# Altium PCB WorldClock.PcbDoc (part 2 of 13)
Units mil, origin at the board's own origin, x right, y up, seen from the top; angles counter-clockwise.
Board outline 3700 x 3850 mil, 2 copper layers (Top Layer, Bottom Layer); 227 components, 134 nets, 1324 pads, 248 vias.
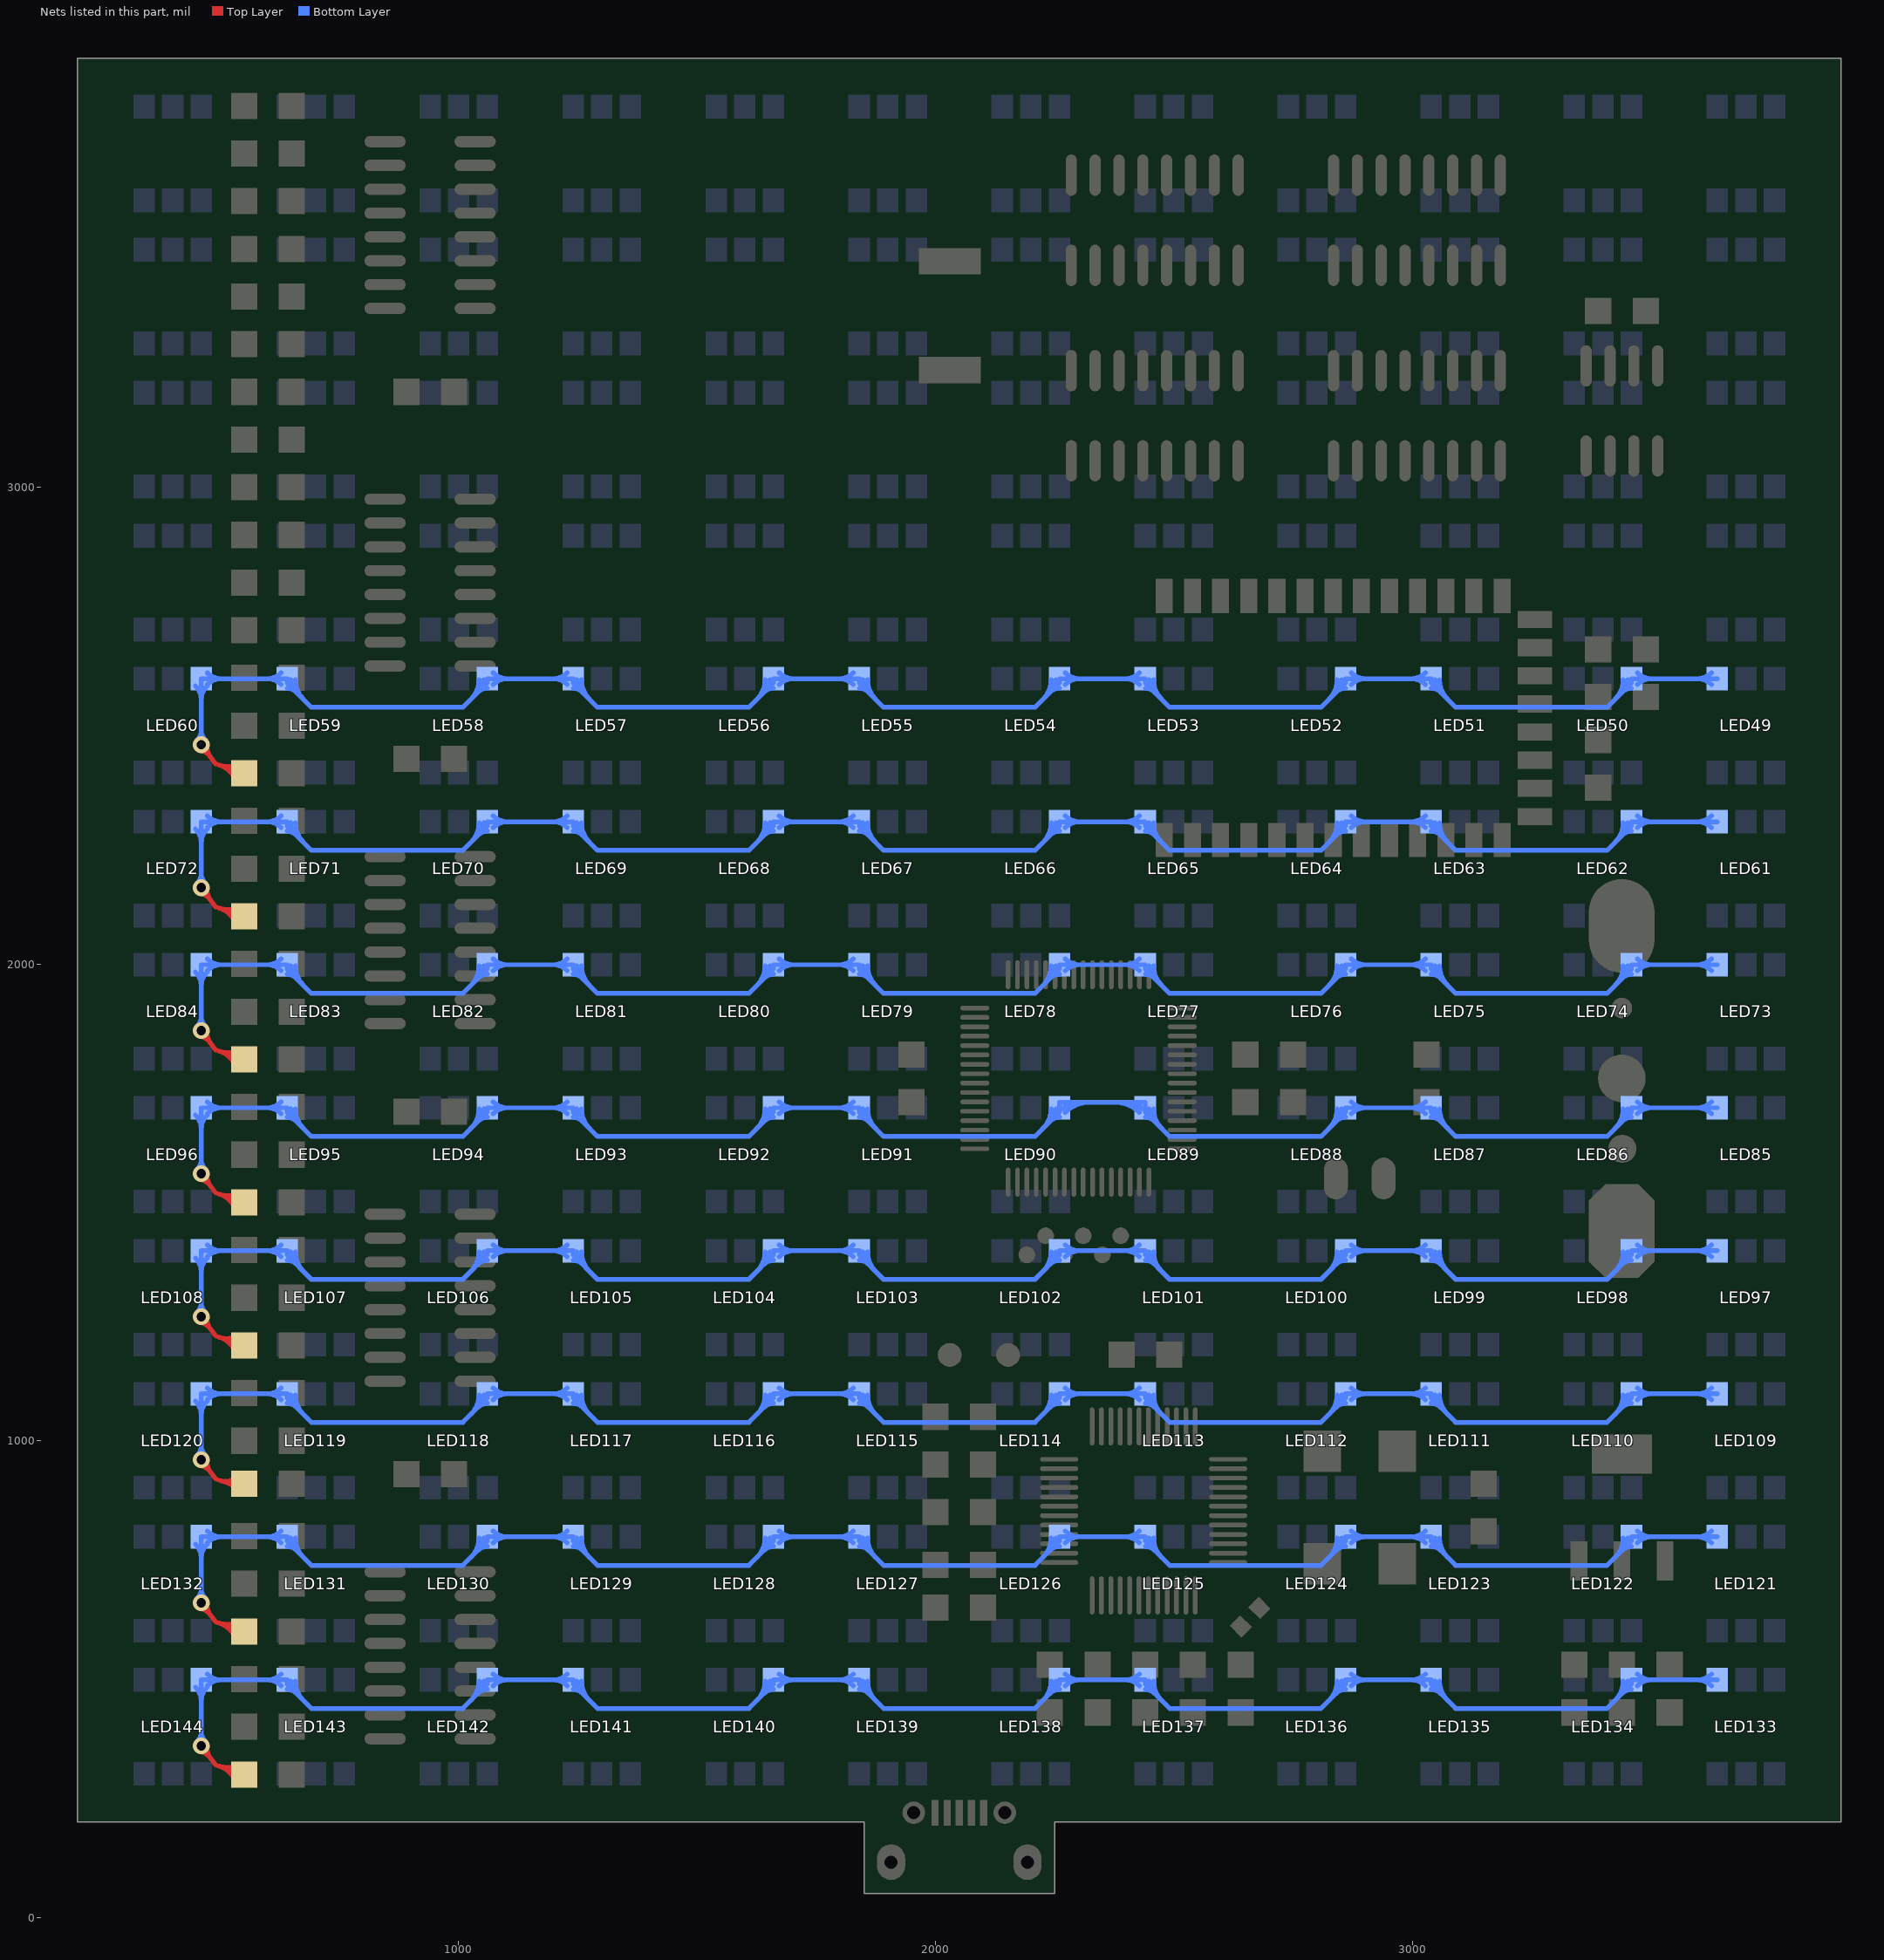
[diagram p2: the nets of this part, all layers, seen from the top]

## Via types
v1: diameter 35, hole 20, Top Layer to Bottom Layer, tented both sides, 213 vias
v2: diameter 24, hole 12, Top Layer to Bottom Layer, tented both sides, 35 vias

## Nets (pads, with @x,y where several pads share a name; then routed paths per layer and width w, separated by ;. In a path a pad name is that pad's centre, name@x,y a point inside that pad or via, vN(x,y) a via of type N, cw(c..) or ccw(c..) an arc to the next point about the centre after c; other vN are vias at no path point) (continued)
B5: LED49.1 LED50.3 LED51.1 LED52.3 LED53.1 LED54.3 LED55.1 LED56.3 LED57.1 LED58.3 LED59.1 LED60.3 R24.1 | length 5745.2
  Top Layer w10: v1@458.23,2447.63 cw(c453.96,2417.75) 478.11,2435.86 cw(c502.25,2453.96) v1@472.37,2458.23 ; v1(460,2460) 490,2420 R24.1@550,2400 ; R24.1@529.88,2389.94 ccw(c481.29,2365.65) 498.47,2417.18 ccw(c515.65,2468.71) R24.1@539.94,2420.12 ; R24.1@538.82,2394.41 ccw(c511.83,2380.91) 521.37,2409.54 ccw(c530.91,2438.17) R24.1@544.41,2411.18
  Bottom Layer w10: LED60.3@447.63,2583.55 cw(c417.75,2553.68) 460,2553.68 cw(c502.25,2553.68) LED60.3@472.37,2583.55 ; v1@451.16,2468.84 ccw(c429.82,2490.18) 460,2490.18 ccw(c490.18,2490.18) v1@468.84,2468.84 ; v1(460,2460) LED60.3@460,2598.43 LED59.1@640,2598.43 640,2589.71 691.29,2538.43 1008.71,2538.43 1060,2589.71 LED58.3@1060,2598.43 LED57.1@1240,2598.43 1240,2589.71 1291.29,2538.43 1608.71,2538.43 1660,2589.71 LED56.3@1660,2598.43 LED55.1@1840,2598.43 1840,2589.71 1891.29,2538.43 2208.71,2538.43 2260,2589.71 LED54.3@2260,2598.43 LED53.1@2440,2598.43 2440,2589.71 2491.29,2538.43 2808.71,2538.43 2860,2589.71 LED52.3@2860,2598.43 LED51.1@3040,2598.43 3040,2589.71 3091.29,2538.43 3408.71,2538.43 3460,2589.71 LED50.3@3460,2598.43 LED49.1@3640,2598.43 ; LED60.3@472.37,2586.05 cw(c502.25,2556.18) 502.25,2598.43 cw(c502.25,2640.67) LED60.3@472.37,2610.8 ; LED59.1@627.63,2586.05 ccw(c597.75,2556.18) 597.75,2598.43 ccw(c597.75,2640.67) LED59.1@627.63,2610.8 ; LED59.1@640,2578.43 cw(c640,2551.18) 659.27,2570.44 ; LED59.1@647.5,2595.93 ccw(c680.61,2595.93) 657.2,2572.52 ; LED59.1@657.5,2595.93 ccw(c714.75,2595.93) 674.27,2555.44 ; 1025.73,2555.44 ccw(c985.25,2595.93) LED58.3@1042.5,2595.93 ; 1040.73,2570.44 cw(c1060,2551.18) LED58.3@1060,2578.43 ; 1042.8,2572.52 ccw(c1019.39,2595.93) LED58.3@1052.5,2595.93 ; LED58.3@1072.37,2586.05 cw(c1102.25,2556.18) 1102.25,2598.43 cw(c1102.25,2640.67) LED58.3@1072.37,2610.8 ; LED57.1@1227.63,2586.05 ccw(c1197.75,2556.18) 1197.75,2598.43 ccw(c1197.75,2640.67) LED57.1@1227.63,2610.8 ; LED57.1@1240,2578.43 cw(c1240,2551.18) 1259.27,2570.44 ; LED57.1@1247.5,2595.93 ccw(c1280.61,2595.93) 1257.2,2572.52 ; LED57.1@1257.5,2595.93 ccw(c1314.75,2595.93) 1274.27,2555.44 ; 1625.73,2555.44 ccw(c1585.25,2595.93) LED56.3@1642.5,2595.93 ; 1640.73,2570.44 cw(c1660,2551.18) LED56.3@1660,2578.43 ; 1642.8,2572.52 ccw(c1619.39,2595.93) LED56.3@1652.5,2595.93 ; LED56.3@1672.37,2586.05 cw(c1702.25,2556.18) 1702.25,2598.43 cw(c1702.25,2640.67) LED56.3@1672.37,2610.8 ; LED55.1@1827.63,2586.05 ccw(c1797.75,2556.18) 1797.75,2598.43 ccw(c1797.75,2640.67) LED55.1@1827.63,2610.8 ; LED55.1@1840,2578.43 cw(c1840,2551.18) 1859.27,2570.44 ; LED55.1@1847.5,2595.93 ccw(c1880.61,2595.93) 1857.2,2572.52 ; LED55.1@1857.5,2595.93 ccw(c1914.75,2595.93) 1874.27,2555.44 ; 2225.73,2555.44 ccw(c2185.25,2595.93) LED54.3@2242.5,2595.93 ; 2240.73,2570.44 cw(c2260,2551.18) LED54.3@2260,2578.43 ; 2242.8,2572.52 ccw(c2219.39,2595.93) LED54.3@2252.5,2595.93 ; LED54.3@2272.37,2586.05 cw(c2302.25,2556.18) 2302.25,2598.43 cw(c2302.25,2640.67) LED54.3@2272.37,2610.8 ; LED53.1@2427.63,2586.05 ccw(c2397.75,2556.18) 2397.75,2598.43 ccw(c2397.75,2640.67) LED53.1@2427.63,2610.8 ; LED53.1@2440,2578.43 cw(c2440,2551.18) 2459.27,2570.44 ; LED53.1@2447.5,2595.93 ccw(c2480.61,2595.93) 2457.2,2572.52 ; LED53.1@2457.5,2595.93 ccw(c2514.75,2595.93) 2474.27,2555.44 ; 2825.73,2555.44 ccw(c2785.25,2595.93) LED52.3@2842.5,2595.93 ; 2840.73,2570.44 cw(c2860,2551.18) LED52.3@2860,2578.43 ; 2842.8,2572.52 ccw(c2819.39,2595.93) LED52.3@2852.5,2595.93 ; LED52.3@2872.37,2586.05 cw(c2902.25,2556.18) 2902.25,2598.43 cw(c2902.25,2640.67) LED52.3@2872.37,2610.8 ; LED51.1@3027.63,2586.05 ccw(c2997.75,2556.18) 2997.75,2598.43 ccw(c2997.75,2640.67) LED51.1@3027.63,2610.8 ; LED51.1@3040,2578.43 cw(c3040,2551.18) 3059.27,2570.44 ; LED51.1@3047.5,2595.93 ccw(c3080.61,2595.93) 3057.2,2572.52 ; LED51.1@3057.5,2595.93 ccw(c3114.75,2595.93) 3074.27,2555.44 ; 3425.73,2555.44 ccw(c3385.25,2595.93) LED50.3@3442.5,2595.93 ; 3440.73,2570.44 cw(c3460,2551.18) LED50.3@3460,2578.43 ; 3442.8,2572.52 ccw(c3419.39,2595.93) LED50.3@3452.5,2595.93 ; LED50.3@3472.37,2586.05 cw(c3502.25,2556.18) 3502.25,2598.43 cw(c3502.25,2640.67) LED50.3@3472.37,2610.8 ; LED49.1@3627.63,2586.05 ccw(c3597.75,2556.18) 3597.75,2598.43 ccw(c3597.75,2640.67) LED49.1@3627.63,2610.8
B6: LED61.1 LED62.3 LED63.1 LED64.3 LED65.1 LED66.3 LED67.1 LED68.3 LED69.1 LED70.3 LED71.1 LED72.3 R26.1 | length 5745.2
  Top Layer w10: v1@458.23,2147.63 cw(c453.96,2117.75) 478.11,2135.86 cw(c502.25,2153.96) v1@472.37,2158.23 ; v1(460,2160) 490,2120 R26.1@550,2100 ; R26.1@529.88,2089.94 ccw(c481.29,2065.65) 498.47,2117.18 ccw(c515.65,2168.71) R26.1@539.94,2120.12 ; R26.1@538.82,2094.41 ccw(c511.83,2080.91) 521.37,2109.54 ccw(c530.91,2138.17) R26.1@544.41,2111.18
  Bottom Layer w10: LED72.3@447.63,2283.55 cw(c417.75,2253.68) 460,2253.68 cw(c502.25,2253.68) LED72.3@472.37,2283.55 ; v1@451.16,2168.84 ccw(c429.82,2190.18) 460,2190.18 ccw(c490.18,2190.18) v1@468.84,2168.84 ; v1(460,2160) LED72.3@460,2298.43 LED71.1@640,2298.43 640,2289.71 691.29,2238.43 1008.71,2238.43 1060,2289.71 LED70.3@1060,2298.43 LED69.1@1240,2298.43 1240,2289.71 1291.29,2238.43 1608.71,2238.43 1660,2289.71 LED68.3@1660,2298.43 LED67.1@1840,2298.43 1840,2289.71 1891.29,2238.43 2208.71,2238.43 2260,2289.71 LED66.3@2260,2298.43 LED65.1@2440,2298.43 2440,2289.71 2491.29,2238.43 2808.71,2238.43 2860,2289.71 LED64.3@2860,2298.43 LED63.1@3040,2298.43 3040,2289.71 3091.29,2238.43 3408.71,2238.43 3460,2289.71 LED62.3@3460,2298.43 LED61.1@3640,2298.43 ; LED72.3@472.37,2286.05 cw(c502.25,2256.18) 502.25,2298.43 cw(c502.25,2340.67) LED72.3@472.37,2310.8 ; LED71.1@627.63,2286.05 ccw(c597.75,2256.18) 597.75,2298.43 ccw(c597.75,2340.67) LED71.1@627.63,2310.8 ; LED71.1@640,2278.43 cw(c640,2251.18) 659.27,2270.44 ; LED71.1@647.5,2295.93 ccw(c680.61,2295.93) 657.2,2272.52 ; LED71.1@657.5,2295.93 ccw(c714.75,2295.93) 674.27,2255.44 ; 1025.73,2255.44 ccw(c985.25,2295.93) LED70.3@1042.5,2295.93 ; 1040.73,2270.44 cw(c1060,2251.18) LED70.3@1060,2278.43 ; 1042.8,2272.52 ccw(c1019.39,2295.93) LED70.3@1052.5,2295.93 ; LED70.3@1072.37,2286.05 cw(c1102.25,2256.18) 1102.25,2298.43 cw(c1102.25,2340.67) LED70.3@1072.37,2310.8 ; LED69.1@1227.63,2286.05 ccw(c1197.75,2256.18) 1197.75,2298.43 ccw(c1197.75,2340.67) LED69.1@1227.63,2310.8 ; LED69.1@1240,2278.43 cw(c1240,2251.18) 1259.27,2270.44 ; LED69.1@1247.5,2295.93 ccw(c1280.61,2295.93) 1257.2,2272.52 ; LED69.1@1257.5,2295.93 ccw(c1314.75,2295.93) 1274.27,2255.44 ; 1625.73,2255.44 ccw(c1585.25,2295.93) LED68.3@1642.5,2295.93 ; 1640.73,2270.44 cw(c1660,2251.18) LED68.3@1660,2278.43 ; 1642.8,2272.52 ccw(c1619.39,2295.93) LED68.3@1652.5,2295.93 ; LED68.3@1672.37,2286.05 cw(c1702.25,2256.18) 1702.25,2298.43 cw(c1702.25,2340.67) LED68.3@1672.37,2310.8 ; LED67.1@1827.63,2286.05 ccw(c1797.75,2256.18) 1797.75,2298.43 ccw(c1797.75,2340.67) LED67.1@1827.63,2310.8 ; LED67.1@1840,2278.43 cw(c1840,2251.18) 1859.27,2270.44 ; LED67.1@1847.5,2295.93 ccw(c1880.61,2295.93) 1857.2,2272.52 ; LED67.1@1857.5,2295.93 ccw(c1914.75,2295.93) 1874.27,2255.44 ; 2225.73,2255.44 ccw(c2185.25,2295.93) LED66.3@2242.5,2295.93 ; 2240.73,2270.44 cw(c2260,2251.18) LED66.3@2260,2278.43 ; 2242.8,2272.52 ccw(c2219.39,2295.93) LED66.3@2252.5,2295.93 ; LED66.3@2272.37,2286.05 cw(c2302.25,2256.18) 2302.25,2298.43 cw(c2302.25,2340.67) LED66.3@2272.37,2310.8 ; LED65.1@2427.63,2286.05 ccw(c2397.75,2256.18) 2397.75,2298.43 ccw(c2397.75,2340.67) LED65.1@2427.63,2310.8 ; LED65.1@2440,2278.43 cw(c2440,2251.18) 2459.27,2270.44 ; LED65.1@2447.5,2295.93 ccw(c2480.61,2295.93) 2457.2,2272.52 ; LED65.1@2457.5,2295.93 ccw(c2514.75,2295.93) 2474.27,2255.44 ; 2825.73,2255.44 ccw(c2785.25,2295.93) LED64.3@2842.5,2295.93 ; 2840.73,2270.44 cw(c2860,2251.18) LED64.3@2860,2278.43 ; 2842.8,2272.52 ccw(c2819.39,2295.93) LED64.3@2852.5,2295.93 ; LED64.3@2872.37,2286.05 cw(c2902.25,2256.18) 2902.25,2298.43 cw(c2902.25,2340.67) LED64.3@2872.37,2310.8 ; LED63.1@3027.63,2286.05 ccw(c2997.75,2256.18) 2997.75,2298.43 ccw(c2997.75,2340.67) LED63.1@3027.63,2310.8 ; LED63.1@3040,2278.43 cw(c3040,2251.18) 3059.27,2270.44 ; LED63.1@3047.5,2295.93 ccw(c3080.61,2295.93) 3057.2,2272.52 ; LED63.1@3057.5,2295.93 ccw(c3114.75,2295.93) 3074.27,2255.44 ; 3425.73,2255.44 ccw(c3385.25,2295.93) LED62.3@3442.5,2295.93 ; 3440.73,2270.44 cw(c3460,2251.18) LED62.3@3460,2278.43 ; 3442.8,2272.52 ccw(c3419.39,2295.93) LED62.3@3452.5,2295.93 ; LED62.3@3472.37,2286.05 cw(c3502.25,2256.18) 3502.25,2298.43 cw(c3502.25,2340.67) LED62.3@3472.37,2310.8 ; LED61.1@3627.63,2286.05 ccw(c3597.75,2256.18) 3597.75,2298.43 ccw(c3597.75,2340.67) LED61.1@3627.63,2310.8
B7: LED73.1 LED74.3 LED75.1 LED76.3 LED77.1 LED78.3 LED79.1 LED80.3 LED81.1 LED82.3 LED83.1 LED84.3 R30.1 | length 5745.2
  Top Layer w10: v1@458.23,1847.63 cw(c453.96,1817.75) 478.11,1835.86 cw(c502.25,1853.96) v1@472.37,1858.23 ; v1(460,1860) 490,1820 R30.1@550,1800 ; R30.1@529.88,1789.94 ccw(c481.29,1765.65) 498.47,1817.18 ccw(c515.65,1868.71) R30.1@539.94,1820.12 ; R30.1@538.82,1794.41 ccw(c511.83,1780.91) 521.37,1809.54 ccw(c530.91,1838.17) R30.1@544.41,1811.18
  Bottom Layer w10: LED84.3@447.63,1983.55 cw(c417.75,1953.68) 460,1953.68 cw(c502.25,1953.68) LED84.3@472.37,1983.55 ; v1@451.16,1868.84 ccw(c429.82,1890.18) 460,1890.18 ccw(c490.18,1890.18) v1@468.84,1868.84 ; v1(460,1860) LED84.3@460,1998.43 LED83.1@640,1998.43 640,1989.71 691.29,1938.43 1008.71,1938.43 1060,1989.71 LED82.3@1060,1998.43 LED81.1@1240,1998.43 1240,1989.71 1291.29,1938.43 1608.71,1938.43 1660,1989.71 LED80.3@1660,1998.43 LED79.1@1840,1998.43 1840,1989.71 1891.29,1938.43 2208.71,1938.43 2260,1989.71 LED78.3@2260,1998.43 LED77.1@2440,1998.43 2440,1989.71 2491.29,1938.43 2808.71,1938.43 2860,1989.71 LED76.3@2860,1998.43 LED75.1@3040,1998.43 3040,1989.71 3091.29,1938.43 3408.71,1938.43 3460,1989.71 LED74.3@3460,1998.43 LED73.1@3640,1998.43 ; LED84.3@472.37,1986.05 cw(c502.25,1956.18) 502.25,1998.43 cw(c502.25,2040.67) LED84.3@472.37,2010.8 ; LED83.1@627.63,1986.05 ccw(c597.75,1956.18) 597.75,1998.43 ccw(c597.75,2040.67) LED83.1@627.63,2010.8 ; LED83.1@640,1978.43 cw(c640,1951.18) 659.27,1970.44 ; LED83.1@647.5,1995.93 ccw(c680.61,1995.93) 657.2,1972.52 ; LED83.1@657.5,1995.93 ccw(c714.75,1995.93) 674.27,1955.44 ; 1025.73,1955.44 ccw(c985.25,1995.93) LED82.3@1042.5,1995.93 ; 1040.73,1970.44 cw(c1060,1951.18) LED82.3@1060,1978.43 ; 1042.8,1972.52 ccw(c1019.39,1995.93) LED82.3@1052.5,1995.93 ; LED82.3@1072.37,1986.05 cw(c1102.25,1956.18) 1102.25,1998.43 cw(c1102.25,2040.67) LED82.3@1072.37,2010.8 ; LED81.1@1227.63,1986.05 ccw(c1197.75,1956.18) 1197.75,1998.43 ccw(c1197.75,2040.67) LED81.1@1227.63,2010.8 ; LED81.1@1240,1978.43 cw(c1240,1951.18) 1259.27,1970.44 ; LED81.1@1247.5,1995.93 ccw(c1280.61,1995.93) 1257.2,1972.52 ; LED81.1@1257.5,1995.93 ccw(c1314.75,1995.93) 1274.27,1955.44 ; 1625.73,1955.44 ccw(c1585.25,1995.93) LED80.3@1642.5,1995.93 ; 1640.73,1970.44 cw(c1660,1951.18) LED80.3@1660,1978.43 ; 1642.8,1972.52 ccw(c1619.39,1995.93) LED80.3@1652.5,1995.93 ; LED80.3@1672.37,1986.05 cw(c1702.25,1956.18) 1702.25,1998.43 cw(c1702.25,2040.67) LED80.3@1672.37,2010.8 ; LED79.1@1827.63,1986.05 ccw(c1797.75,1956.18) 1797.75,1998.43 ccw(c1797.75,2040.67) LED79.1@1827.63,2010.8 ; LED79.1@1840,1978.43 cw(c1840,1951.18) 1859.27,1970.44 ; LED79.1@1847.5,1995.93 ccw(c1880.61,1995.93) 1857.2,1972.52 ; LED79.1@1857.5,1995.93 ccw(c1914.75,1995.93) 1874.27,1955.44 ; 2225.73,1955.44 ccw(c2185.25,1995.93) LED78.3@2242.5,1995.93 ; 2240.73,1970.44 cw(c2260,1951.18) LED78.3@2260,1978.43 ; 2242.8,1972.52 ccw(c2219.39,1995.93) LED78.3@2252.5,1995.93 ; LED78.3@2272.37,1986.05 cw(c2302.25,1956.18) 2302.25,1998.43 cw(c2302.25,2040.67) LED78.3@2272.37,2010.8 ; LED77.1@2427.63,1986.05 ccw(c2397.75,1956.18) 2397.75,1998.43 ccw(c2397.75,2040.67) LED77.1@2427.63,2010.8 ; LED77.1@2440,1978.43 cw(c2440,1951.18) 2459.27,1970.44 ; LED77.1@2447.5,1995.93 ccw(c2480.61,1995.93) 2457.2,1972.52 ; LED77.1@2457.5,1995.93 ccw(c2514.75,1995.93) 2474.27,1955.44 ; 2825.73,1955.44 ccw(c2785.25,1995.93) LED76.3@2842.5,1995.93 ; 2840.73,1970.44 cw(c2860,1951.18) LED76.3@2860,1978.43 ; 2842.8,1972.52 ccw(c2819.39,1995.93) LED76.3@2852.5,1995.93 ; LED76.3@2872.37,1986.05 cw(c2902.25,1956.18) 2902.25,1998.43 cw(c2902.25,2040.67) LED76.3@2872.37,2010.8 ; LED75.1@3027.63,1986.05 ccw(c2997.75,1956.18) 2997.75,1998.43 ccw(c2997.75,2040.67) LED75.1@3027.63,2010.8 ; LED75.1@3040,1978.43 cw(c3040,1951.18) 3059.27,1970.44 ; LED75.1@3047.5,1995.93 ccw(c3080.61,1995.93) 3057.2,1972.52 ; LED75.1@3057.5,1995.93 ccw(c3114.75,1995.93) 3074.27,1955.44 ; 3425.73,1955.44 ccw(c3385.25,1995.93) LED74.3@3442.5,1995.93 ; 3440.73,1970.44 cw(c3460,1951.18) LED74.3@3460,1978.43 ; 3442.8,1972.52 ccw(c3419.39,1995.93) LED74.3@3452.5,1995.93 ; LED74.3@3472.37,1986.05 cw(c3502.25,1956.18) 3502.25,1998.43 cw(c3502.25,2040.67) LED74.3@3472.37,2010.8 ; LED73.1@3627.63,1986.05 ccw(c3597.75,1956.18) 3597.75,1998.43 ccw(c3597.75,2040.67) LED73.1@3627.63,2010.8
B8: LED85.1 LED86.3 LED87.1 LED88.3 LED89.1 LED90.3 LED91.1 LED92.3 LED93.1 LED94.3 LED95.1 LED96.3 R33.1 | length 5827.7
  Top Layer w10: v1@458.23,1547.63 cw(c453.96,1517.75) 478.11,1535.86 cw(c502.25,1553.96) v1@472.37,1558.23 ; v1(460,1560) 490,1520 R33.1@550,1500 ; R33.1@529.88,1489.94 ccw(c481.29,1465.65) 498.47,1517.18 ccw(c515.65,1568.71) R33.1@539.94,1520.12 ; R33.1@538.82,1494.41 ccw(c511.83,1480.91) 521.37,1509.54 ccw(c530.91,1538.17) R33.1@544.41,1511.18
  Bottom Layer w10: LED96.3@447.63,1683.55 cw(c417.75,1653.68) 460,1653.68 cw(c502.25,1653.68) LED96.3@472.37,1683.55 ; v1@451.16,1568.84 ccw(c429.82,1590.18) 460,1590.18 ccw(c490.18,1590.18) v1@468.84,1568.84 ; v1(460,1560) LED96.3@460,1698.43 LED95.1@640,1698.43 640,1689.71 691.29,1638.43 1008.71,1638.43 1060,1689.71 LED94.3@1060,1698.43 LED93.1@1240,1698.43 1240,1689.71 1291.29,1638.43 1608.71,1638.43 1660,1689.71 LED92.3@1660,1698.43 LED91.1@1840,1698.43 1840,1689.71 1891.29,1638.43 2208.71,1638.43 2260,1689.71 2260,1710 2440,1710 2440,1689.71 2491.29,1638.43 2808.71,1638.43 2860,1689.71 LED88.3@2860,1698.43 LED87.1@3040,1698.43 3040,1689.71 3091.29,1638.43 3408.71,1638.43 3460,1689.71 LED86.3@3460,1698.43 LED85.1@3640,1698.43 ; LED96.3@472.37,1686.05 cw(c502.25,1656.18) 502.25,1698.43 cw(c502.25,1740.67) LED96.3@472.37,1710.8 ; LED95.1@627.63,1686.05 ccw(c597.75,1656.18) 597.75,1698.43 ccw(c597.75,1740.67) LED95.1@627.63,1710.8 ; LED95.1@640,1678.43 cw(c640,1651.18) 659.27,1670.44 ; LED95.1@647.5,1695.93 ccw(c680.61,1695.93) 657.2,1672.52 ; LED95.1@657.5,1695.93 ccw(c714.75,1695.93) 674.27,1655.44 ; 1025.73,1655.44 ccw(c985.25,1695.93) LED94.3@1042.5,1695.93 ; 1040.73,1670.44 cw(c1060,1651.18) LED94.3@1060,1678.43 ; 1042.8,1672.52 ccw(c1019.39,1695.93) LED94.3@1052.5,1695.93 ; LED94.3@1072.37,1686.05 cw(c1102.25,1656.18) 1102.25,1698.43 cw(c1102.25,1740.67) LED94.3@1072.37,1710.8 ; LED93.1@1227.63,1686.05 ccw(c1197.75,1656.18) 1197.75,1698.43 ccw(c1197.75,1740.67) LED93.1@1227.63,1710.8 ; LED93.1@1240,1678.43 cw(c1240,1651.18) 1259.27,1670.44 ; LED93.1@1247.5,1695.93 ccw(c1280.61,1695.93) 1257.2,1672.52 ; LED93.1@1257.5,1695.93 ccw(c1314.75,1695.93) 1274.27,1655.44 ; 1625.73,1655.44 ccw(c1585.25,1695.93) LED92.3@1642.5,1695.93 ; 1640.73,1670.44 cw(c1660,1651.18) LED92.3@1660,1678.43 ; 1642.8,1672.52 ccw(c1619.39,1695.93) LED92.3@1652.5,1695.93 ; LED92.3@1672.37,1686.05 cw(c1702.25,1656.18) 1702.25,1698.43 cw(c1702.25,1740.67) LED92.3@1672.37,1710.8 ; LED91.1@1827.63,1686.05 ccw(c1797.75,1656.18) 1797.75,1698.43 ccw(c1797.75,1740.67) LED91.1@1827.63,1710.8 ; LED91.1@1840,1678.43 cw(c1840,1651.18) 1859.27,1670.44 ; LED91.1@1847.5,1695.93 ccw(c1880.61,1695.93) 1857.2,1672.52 ; LED91.1@1857.5,1695.93 ccw(c1914.75,1695.93) 1874.27,1655.44 ; 2225.73,1655.44 ccw(c2185.25,1695.93) LED90.3@2242.5,1695.93 ; 2240.73,1670.44 cw(c2260,1651.18) LED90.3@2260,1678.43 ; 2242.8,1672.52 ccw(c2219.39,1695.93) LED90.3@2252.5,1695.93 ; LED90.3@2265.3,1695.62 cw(c2300.02,1660.91) 2300.02,1710 ; LED90.3@2272.37,1688.55 cw(c2324.16,1636.77) 2324.16,1710 ; 2375.84,1710 cw(c2375.84,1636.77) LED89.1@2427.63,1688.55 ; 2399.98,1710 cw(c2399.98,1660.91) LED89.1@2434.7,1695.62 ; LED89.1@2440,1678.43 cw(c2440,1651.18) 2459.27,1670.44 ; LED89.1@2447.5,1695.93 ccw(c2480.61,1695.93) 2457.2,1672.52 ; LED89.1@2457.5,1695.93 ccw(c2514.75,1695.93) 2474.27,1655.44 ; 2825.73,1655.44 ccw(c2785.25,1695.93) LED88.3@2842.5,1695.93 ; 2840.73,1670.44 cw(c2860,1651.18) LED88.3@2860,1678.43 ; 2842.8,1672.52 ccw(c2819.39,1695.93) LED88.3@2852.5,1695.93 ; LED88.3@2872.37,1686.05 cw(c2902.25,1656.18) 2902.25,1698.43 cw(c2902.25,1740.67) LED88.3@2872.37,1710.8 ; LED87.1@3027.63,1686.05 ccw(c2997.75,1656.18) 2997.75,1698.43 ccw(c2997.75,1740.67) LED87.1@3027.63,1710.8 ; LED87.1@3040,1678.43 cw(c3040,1651.18) 3059.27,1670.44 ; LED87.1@3047.5,1695.93 ccw(c3080.61,1695.93) 3057.2,1672.52 ; LED87.1@3057.5,1695.93 ccw(c3114.75,1695.93) 3074.27,1655.44 ; 3425.73,1655.44 ccw(c3385.25,1695.93) LED86.3@3442.5,1695.93 ; 3440.73,1670.44 cw(c3460,1651.18) LED86.3@3460,1678.43 ; 3442.8,1672.52 ccw(c3419.39,1695.93) LED86.3@3452.5,1695.93 ; LED86.3@3472.37,1686.05 cw(c3502.25,1656.18) 3502.25,1698.43 cw(c3502.25,1740.67) LED86.3@3472.37,1710.8 ; LED85.1@3627.63,1686.05 ccw(c3597.75,1656.18) 3597.75,1698.43 ccw(c3597.75,1740.67) LED85.1@3627.63,1710.8
B9: LED97.1 LED98.3 LED99.1 LED100.3 LED101.1 LED102.3 LED103.1 LED104.3 LED105.1 LED106.3 LED107.1 LED108.3 R35.1 | length 5745.2
  Top Layer w10: v1@458.23,1247.63 cw(c453.96,1217.75) 478.11,1235.86 cw(c502.25,1253.96) v1@472.37,1258.23 ; v1(460,1260) 490,1220 R35.1@550,1200 ; R35.1@529.88,1189.94 ccw(c481.29,1165.65) 498.47,1217.18 ccw(c515.65,1268.71) R35.1@539.94,1220.12 ; R35.1@538.82,1194.41 ccw(c511.83,1180.91) 521.37,1209.54 ccw(c530.91,1238.17) R35.1@544.41,1211.18
  Bottom Layer w10: LED108.3@447.63,1383.55 cw(c417.75,1353.68) 460,1353.68 cw(c502.25,1353.68) LED108.3@472.37,1383.55 ; v1@451.16,1268.84 ccw(c429.82,1290.18) 460,1290.18 ccw(c490.18,1290.18) v1@468.84,1268.84 ; v1(460,1260) LED108.3@460,1398.43 LED107.1@640,1398.43 640,1389.71 691.29,1338.43 1008.71,1338.43 1060,1389.71 LED106.3@1060,1398.43 LED105.1@1240,1398.43 1240,1389.71 1291.29,1338.43 1608.71,1338.43 1660,1389.71 LED104.3@1660,1398.43 LED103.1@1840,1398.43 1840,1389.71 1891.29,1338.43 2208.71,1338.43 2260,1389.71 LED102.3@2260,1398.43 LED101.1@2440,1398.43 2440,1389.71 2491.29,1338.43 2808.71,1338.43 2860,1389.71 LED100.3@2860,1398.43 LED99.1@3040,1398.43 3040,1389.71 3091.29,1338.43 3408.71,1338.43 3460,1389.71 LED98.3@3460,1398.43 LED97.1@3640,1398.43 ; LED108.3@472.37,1386.05 cw(c502.25,1356.18) 502.25,1398.43 cw(c502.25,1440.67) LED108.3@472.37,1410.8 ; LED107.1@627.63,1386.05 ccw(c597.75,1356.18) 597.75,1398.43 ccw(c597.75,1440.67) LED107.1@627.63,1410.8 ; LED107.1@640,1378.43 cw(c640,1351.18) 659.27,1370.44 ; LED107.1@647.5,1395.93 ccw(c680.61,1395.93) 657.2,1372.52 ; LED107.1@657.5,1395.93 ccw(c714.75,1395.93) 674.27,1355.44 ; 1025.73,1355.44 ccw(c985.25,1395.93) LED106.3@1042.5,1395.93 ; 1040.73,1370.44 cw(c1060,1351.18) LED106.3@1060,1378.43 ; 1042.8,1372.52 ccw(c1019.39,1395.93) LED106.3@1052.5,1395.93 ; LED106.3@1072.37,1386.05 cw(c1102.25,1356.18) 1102.25,1398.43 cw(c1102.25,1440.67) LED106.3@1072.37,1410.8 ; LED105.1@1227.63,1386.05 ccw(c1197.75,1356.18) 1197.75,1398.43 ccw(c1197.75,1440.67) LED105.1@1227.63,1410.8 ; LED105.1@1240,1378.43 cw(c1240,1351.18) 1259.27,1370.44 ; LED105.1@1247.5,1395.93 ccw(c1280.61,1395.93) 1257.2,1372.52 ; LED105.1@1257.5,1395.93 ccw(c1314.75,1395.93) 1274.27,1355.44 ; 1625.73,1355.44 ccw(c1585.25,1395.93) LED104.3@1642.5,1395.93 ; 1640.73,1370.44 cw(c1660,1351.18) LED104.3@1660,1378.43 ; 1642.8,1372.52 ccw(c1619.39,1395.93) LED104.3@1652.5,1395.93 ; LED104.3@1672.37,1386.05 cw(c1702.25,1356.18) 1702.25,1398.43 cw(c1702.25,1440.67) LED104.3@1672.37,1410.8 ; LED103.1@1827.63,1386.05 ccw(c1797.75,1356.18) 1797.75,1398.43 ccw(c1797.75,1440.67) LED103.1@1827.63,1410.8 ; LED103.1@1840,1378.43 cw(c1840,1351.18) 1859.27,1370.44 ; LED103.1@1847.5,1395.93 ccw(c1880.61,1395.93) 1857.2,1372.52 ; LED103.1@1857.5,1395.93 ccw(c1914.75,1395.93) 1874.27,1355.44 ; 2225.73,1355.44 ccw(c2185.25,1395.93) LED102.3@2242.5,1395.93 ; 2240.73,1370.44 cw(c2260,1351.18) LED102.3@2260,1378.43 ; 2242.8,1372.52 ccw(c2219.39,1395.93) LED102.3@2252.5,1395.93 ; LED102.3@2272.37,1386.05 cw(c2302.25,1356.18) 2302.25,1398.43 cw(c2302.25,1440.67) LED102.3@2272.37,1410.8 ; LED101.1@2427.63,1386.05 ccw(c2397.75,1356.18) 2397.75,1398.43 ccw(c2397.75,1440.67) LED101.1@2427.63,1410.8 ; LED101.1@2440,1378.43 cw(c2440,1351.18) 2459.27,1370.44 ; LED101.1@2447.5,1395.93 ccw(c2480.61,1395.93) 2457.2,1372.52 ; LED101.1@2457.5,1395.93 ccw(c2514.75,1395.93) 2474.27,1355.44 ; 2825.73,1355.44 ccw(c2785.25,1395.93) LED100.3@2842.5,1395.93 ; 2840.73,1370.44 cw(c2860,1351.18) LED100.3@2860,1378.43 ; 2842.8,1372.52 ccw(c2819.39,1395.93) LED100.3@2852.5,1395.93 ; LED100.3@2872.37,1386.05 cw(c2902.25,1356.18) 2902.25,1398.43 cw(c2902.25,1440.67) LED100.3@2872.37,1410.8 ; LED99.1@3027.63,1386.05 ccw(c2997.75,1356.18) 2997.75,1398.43 ccw(c2997.75,1440.67) LED99.1@3027.63,1410.8 ; LED99.1@3040,1378.43 cw(c3040,1351.18) 3059.27,1370.44 ; LED99.1@3047.5,1395.93 ccw(c3080.61,1395.93) 3057.2,1372.52 ; LED99.1@3057.5,1395.93 ccw(c3114.75,1395.93) 3074.27,1355.44 ; 3425.73,1355.44 ccw(c3385.25,1395.93) LED98.3@3442.5,1395.93 ; 3440.73,1370.44 cw(c3460,1351.18) LED98.3@3460,1378.43 ; 3442.8,1372.52 ccw(c3419.39,1395.93) LED98.3@3452.5,1395.93 ; LED98.3@3472.37,1386.05 cw(c3502.25,1356.18) 3502.25,1398.43 cw(c3502.25,1440.67) LED98.3@3472.37,1410.8 ; LED97.1@3627.63,1386.05 ccw(c3597.75,1356.18) 3597.75,1398.43 ccw(c3597.75,1440.67) LED97.1@3627.63,1410.8
B10: LED109.1 LED110.3 LED111.1 LED112.3 LED113.1 LED114.3 LED115.1 LED116.3 LED117.1 LED118.3 LED119.1 LED120.3 R39.1 | length 5690.6
  Top Layer w10: v1@458.23,947.63 cw(c453.96,917.75) 478.11,935.86 cw(c502.25,953.96) v1@472.37,958.23 ; v1(460,960) 490,920 R39.1@550,900 ; 502,916 ccw(c511.07,943.19) R39.1@532.88,924.6 ; 516.07,911.31 ccw(c523.24,932.81) R39.1@540.49,918.11 ; 517.2,910.93 cw(c510.26,890.13) R39.1@529.88,899.94
  Bottom Layer w10: LED120.3@447.63,1083.55 cw(c417.75,1053.68) 460,1053.68 cw(c502.25,1053.68) LED120.3@472.37,1083.55 ; v1@451.16,968.84 ccw(c429.82,990.18) 460,990.18 ccw(c490.18,990.18) v1@468.84,968.84 ; v1(460,960) LED120.3@460,1098.43 LED119.1@640,1098.43 640,1089.71 691.29,1038.43 1008.71,1038.43 1060,1089.71 LED118.3@1060,1098.43 LED117.1@1240,1098.43 1240,1089.71 1291.29,1038.43 1608.71,1038.43 1660,1089.71 LED116.3@1660,1098.43 LED115.1@1840,1098.43 1840,1089.71 1891.29,1038.43 2208.71,1038.43 2260,1089.71 LED114.3@2260,1098.43 LED113.1@2440,1098.43 2440,1089.71 2491.29,1038.43 2808.71,1038.43 2860,1089.71 LED112.3@2860,1098.43 LED111.1@3040,1098.43 3040,1089.71 3091.29,1038.43 3408.71,1038.43 3460,1089.71 LED110.3@3460,1098.43 LED109.1@3640,1098.43 ; LED120.3@472.37,1086.05 cw(c502.25,1056.18) 502.25,1098.43 cw(c502.25,1140.67) LED120.3@472.37,1110.8 ; LED119.1@627.63,1086.05 ccw(c597.75,1056.18) 597.75,1098.43 ccw(c597.75,1140.67) LED119.1@627.63,1110.8 ; LED119.1@640,1078.43 cw(c640,1051.18) 659.27,1070.44 ; LED119.1@647.5,1095.93 ccw(c680.61,1095.93) 657.2,1072.52 ; LED119.1@657.5,1095.93 ccw(c714.75,1095.93) 674.27,1055.44 ; 1025.73,1055.44 ccw(c985.25,1095.93) LED118.3@1042.5,1095.93 ; 1040.73,1070.44 cw(c1060,1051.18) LED118.3@1060,1078.43 ; 1042.8,1072.52 ccw(c1019.39,1095.93) LED118.3@1052.5,1095.93 ; LED118.3@1072.37,1086.05 cw(c1102.25,1056.18) 1102.25,1098.43 cw(c1102.25,1140.67) LED118.3@1072.37,1110.8 ; LED117.1@1227.63,1086.05 ccw(c1197.75,1056.18) 1197.75,1098.43 ccw(c1197.75,1140.67) LED117.1@1227.63,1110.8 ; LED117.1@1240,1078.43 cw(c1240,1051.18) 1259.27,1070.44 ; LED117.1@1247.5,1095.93 ccw(c1280.61,1095.93) 1257.2,1072.52 ; LED117.1@1257.5,1095.93 ccw(c1314.75,1095.93) 1274.27,1055.44 ; 1625.73,1055.44 ccw(c1585.25,1095.93) LED116.3@1642.5,1095.93 ; 1640.73,1070.44 cw(c1660,1051.18) LED116.3@1660,1078.43 ; 1642.8,1072.52 ccw(c1619.39,1095.93) LED116.3@1652.5,1095.93 ; LED116.3@1672.37,1086.05 cw(c1702.25,1056.18) 1702.25,1098.43 cw(c1702.25,1140.67) LED116.3@1672.37,1110.8 ; LED115.1@1827.63,1086.05 ccw(c1797.75,1056.18) 1797.75,1098.43 ccw(c1797.75,1140.67) LED115.1@1827.63,1110.8 ; LED115.1@1840,1078.43 cw(c1840,1051.18) 1859.27,1070.44 ; LED115.1@1847.5,1095.93 ccw(c1880.61,1095.93) 1857.2,1072.52 ; LED115.1@1857.5,1095.93 ccw(c1914.75,1095.93) 1874.27,1055.44 ; 2225.73,1055.44 ccw(c2185.25,1095.93) LED114.3@2242.5,1095.93 ; 2240.73,1070.44 cw(c2260,1051.18) LED114.3@2260,1078.43 ; 2242.8,1072.52 ccw(c2219.39,1095.93) LED114.3@2252.5,1095.93 ; LED114.3@2272.37,1086.05 cw(c2302.25,1056.18) 2302.25,1098.43 cw(c2302.25,1140.67) LED114.3@2272.37,1110.8 ; LED113.1@2427.63,1086.05 ccw(c2397.75,1056.18) 2397.75,1098.43 ccw(c2397.75,1140.67) LED113.1@2427.63,1110.8 ; LED113.1@2440,1078.43 cw(c2440,1051.18) 2459.27,1070.44 ; LED113.1@2447.5,1095.93 ccw(c2480.61,1095.93) 2457.2,1072.52 ; LED113.1@2457.5,1095.93 ccw(c2514.75,1095.93) 2474.27,1055.44 ; 2825.73,1055.44 ccw(c2785.25,1095.93) LED112.3@2842.5,1095.93 ; 2840.73,1070.44 cw(c2860,1051.18) LED112.3@2860,1078.43 ; 2842.8,1072.52 ccw(c2819.39,1095.93) LED112.3@2852.5,1095.93 ; LED112.3@2872.37,1086.05 cw(c2902.25,1056.18) 2902.25,1098.43 cw(c2902.25,1140.67) LED112.3@2872.37,1110.8 ; LED111.1@3027.63,1086.05 ccw(c2997.75,1056.18) 2997.75,1098.43 ccw(c2997.75,1140.67) LED111.1@3027.63,1110.8 ; LED111.1@3040,1078.43 cw(c3040,1051.18) 3059.27,1070.44 ; LED111.1@3047.5,1095.93 ccw(c3080.61,1095.93) 3057.2,1072.52 ; LED111.1@3057.5,1095.93 ccw(c3114.75,1095.93) 3074.27,1055.44 ; 3425.73,1055.44 ccw(c3385.25,1095.93) LED110.3@3442.5,1095.93 ; 3440.73,1070.44 cw(c3460,1051.18) LED110.3@3460,1078.43 ; 3442.8,1072.52 ccw(c3419.39,1095.93) LED110.3@3452.5,1095.93 ; LED110.3@3472.37,1086.05 cw(c3502.25,1056.18) 3502.25,1098.43 cw(c3502.25,1140.67) LED110.3@3472.37,1110.8 ; LED109.1@3627.63,1086.05 ccw(c3597.75,1056.18) 3597.75,1098.43 ccw(c3597.75,1140.67) LED109.1@3627.63,1110.8
B11: LED121.1 LED122.3 LED123.1 LED124.3 LED125.1 LED126.3 LED127.1 LED128.3 LED129.1 LED130.3 LED131.1 LED132.3 R44.2 | length 5745.2
  Top Layer w10: v1@458.23,647.63 cw(c453.96,617.75) 478.11,635.86 cw(c502.25,653.96) v1@472.37,658.23 ; v1(460,660) 490,620 R44.2@550,600 ; R44.2@529.88,589.94 ccw(c481.29,565.65) 498.47,617.18 ccw(c515.65,668.71) R44.2@539.94,620.12 ; R44.2@538.82,594.41 ccw(c511.83,580.91) 521.37,609.54 ccw(c530.91,638.17) R44.2@544.41,611.18
  Bottom Layer w10: LED132.3@447.63,783.55 cw(c417.75,753.68) 460,753.68 cw(c502.25,753.68) LED132.3@472.37,783.55 ; v1@451.16,668.84 ccw(c429.82,690.18) 460,690.18 ccw(c490.18,690.18) v1@468.84,668.84 ; v1(460,660) LED132.3@460,798.43 LED131.1@640,798.43 640,789.71 691.29,738.43 1008.71,738.43 1060,789.71 LED130.3@1060,798.43 LED129.1@1240,798.43 1240,789.71 1291.29,738.43 1608.71,738.43 1660,789.71 LED128.3@1660,798.43 LED127.1@1840,798.43 1840,789.71 1891.29,738.43 2208.71,738.43 2260,789.71 LED126.3@2260,798.43 LED125.1@2440,798.43 2440,789.71 2491.29,738.43 2808.71,738.43 2860,789.71 LED124.3@2860,798.43 LED123.1@3040,798.43 3040,789.71 3091.29,738.43 3408.71,738.43 3460,789.71 LED122.3@3460,798.43 LED121.1@3640,798.43 ; LED132.3@472.37,786.05 cw(c502.25,756.18) 502.25,798.43 cw(c502.25,840.67) LED132.3@472.37,810.8 ; LED131.1@627.63,786.05 ccw(c597.75,756.18) 597.75,798.43 ccw(c597.75,840.67) LED131.1@627.63,810.8 ; LED131.1@640,778.43 cw(c640,751.18) 659.27,770.44 ; LED131.1@647.5,795.93 ccw(c680.61,795.93) 657.2,772.52 ; LED131.1@657.5,795.93 ccw(c714.75,795.93) 674.27,755.44 ; 1025.73,755.44 ccw(c985.25,795.93) LED130.3@1042.5,795.93 ; 1040.73,770.44 cw(c1060,751.18) LED130.3@1060,778.43 ; 1042.8,772.52 ccw(c1019.39,795.93) LED130.3@1052.5,795.93 ; LED130.3@1072.37,786.05 cw(c1102.25,756.18) 1102.25,798.43 cw(c1102.25,840.67) LED130.3@1072.37,810.8 ; LED129.1@1227.63,786.05 ccw(c1197.75,756.18) 1197.75,798.43 ccw(c1197.75,840.67) LED129.1@1227.63,810.8 ; LED129.1@1240,778.43 cw(c1240,751.18) 1259.27,770.44 ; LED129.1@1247.5,795.93 ccw(c1280.61,795.93) 1257.2,772.52 ; LED129.1@1257.5,795.93 ccw(c1314.75,795.93) 1274.27,755.44 ; 1625.73,755.44 ccw(c1585.25,795.93) LED128.3@1642.5,795.93 ; 1640.73,770.44 cw(c1660,751.18) LED128.3@1660,778.43 ; 1642.8,772.52 ccw(c1619.39,795.93) LED128.3@1652.5,795.93 ; LED128.3@1672.37,786.05 cw(c1702.25,756.18) 1702.25,798.43 cw(c1702.25,840.67) LED128.3@1672.37,810.8 ; LED127.1@1827.63,786.05 ccw(c1797.75,756.18) 1797.75,798.43 ccw(c1797.75,840.67) LED127.1@1827.63,810.8 ; LED127.1@1840,778.43 cw(c1840,751.18) 1859.27,770.44 ; LED127.1@1847.5,795.93 ccw(c1880.61,795.93) 1857.2,772.52 ; LED127.1@1857.5,795.93 ccw(c1914.75,795.93) 1874.27,755.44 ; 2225.73,755.44 ccw(c2185.25,795.93) LED126.3@2242.5,795.93 ; 2240.73,770.44 cw(c2260,751.18) LED126.3@2260,778.43 ; 2242.8,772.52 ccw(c2219.39,795.93) LED126.3@2252.5,795.93 ; LED126.3@2272.37,786.05 cw(c2302.25,756.18) 2302.25,798.43 cw(c2302.25,840.67) LED126.3@2272.37,810.8 ; LED125.1@2427.63,786.05 ccw(c2397.75,756.18) 2397.75,798.43 ccw(c2397.75,840.67) LED125.1@2427.63,810.8 ; LED125.1@2440,778.43 cw(c2440,751.18) 2459.27,770.44 ; LED125.1@2447.5,795.93 ccw(c2480.61,795.93) 2457.2,772.52 ; LED125.1@2457.5,795.93 ccw(c2514.75,795.93) 2474.27,755.44 ; 2825.73,755.44 ccw(c2785.25,795.93) LED124.3@2842.5,795.93 ; 2840.73,770.44 cw(c2860,751.18) LED124.3@2860,778.43 ; 2842.8,772.52 ccw(c2819.39,795.93) LED124.3@2852.5,795.93 ; LED124.3@2872.37,786.05 cw(c2902.25,756.18) 2902.25,798.43 cw(c2902.25,840.67) LED124.3@2872.37,810.8 ; LED123.1@3027.63,786.05 ccw(c2997.75,756.18) 2997.75,798.43 ccw(c2997.75,840.67) LED123.1@3027.63,810.8 ; LED123.1@3040,778.43 cw(c3040,751.18) 3059.27,770.44 ; LED123.1@3047.5,795.93 ccw(c3080.61,795.93) 3057.2,772.52 ; LED123.1@3057.5,795.93 ccw(c3114.75,795.93) 3074.27,755.44 ; 3425.73,755.44 ccw(c3385.25,795.93) LED122.3@3442.5,795.93 ; 3440.73,770.44 cw(c3460,751.18) LED122.3@3460,778.43 ; 3442.8,772.52 ccw(c3419.39,795.93) LED122.3@3452.5,795.93 ; LED122.3@3472.37,786.05 cw(c3502.25,756.18) 3502.25,798.43 cw(c3502.25,840.67) LED122.3@3472.37,810.8 ; LED121.1@3627.63,786.05 ccw(c3597.75,756.18) 3597.75,798.43 ccw(c3597.75,840.67) LED121.1@3627.63,810.8
B12: LED133.1 LED134.3 LED135.1 LED136.3 LED137.1 LED138.3 LED139.1 LED140.3 LED141.1 LED142.3 LED143.1 LED144.3 R45.1 | length 5745.2
  Top Layer w10: v1@458.23,347.63 cw(c453.96,317.75) 478.11,335.86 cw(c502.25,353.96) v1@472.37,358.23 ; v1(460,360) 490,320 R45.1@550,300 ; R45.1@529.88,289.94 ccw(c481.29,265.65) 498.47,317.18 ccw(c515.65,368.71) R45.1@539.94,320.12 ; R45.1@538.82,294.41 ccw(c511.83,280.91) 521.37,309.54 ccw(c530.91,338.17) R45.1@544.41,311.18
  Bottom Layer w10: LED144.3@447.63,483.55 cw(c417.75,453.68) 460,453.68 cw(c502.25,453.68) LED144.3@472.37,483.55 ; v1@451.16,368.84 ccw(c429.82,390.18) 460,390.18 ccw(c490.18,390.18) v1@468.84,368.84 ; v1(460,360) LED144.3@460,498.43 LED143.1@640,498.43 640,489.71 691.29,438.43 1008.71,438.43 1060,489.71 LED142.3@1060,498.43 LED141.1@1240,498.43 1240,489.71 1291.29,438.43 1608.71,438.43 1660,489.71 LED140.3@1660,498.43 LED139.1@1840,498.43 1840,489.71 1891.29,438.43 2208.71,438.43 2260,489.71 LED138.3@2260,498.43 LED137.1@2440,498.43 2440,489.71 2491.29,438.43 2808.71,438.43 2860,489.71 LED136.3@2860,498.43 LED135.1@3040,498.43 3040,489.71 3091.29,438.43 3408.71,438.43 3460,489.71 LED134.3@3460,498.43 LED133.1@3640,498.43 ; LED144.3@472.37,486.05 cw(c502.25,456.18) 502.25,498.43 cw(c502.25,540.67) LED144.3@472.37,510.8 ; LED143.1@627.63,486.05 ccw(c597.75,456.18) 597.75,498.43 ccw(c597.75,540.67) LED143.1@627.63,510.8 ; LED143.1@640,478.43 cw(c640,451.18) 659.27,470.44 ; LED143.1@647.5,495.93 ccw(c680.61,495.93) 657.2,472.52 ; LED143.1@657.5,495.93 ccw(c714.75,495.93) 674.27,455.44 ; 1025.73,455.44 ccw(c985.25,495.93) LED142.3@1042.5,495.93 ; 1040.73,470.44 cw(c1060,451.18) LED142.3@1060,478.43 ; 1042.8,472.52 ccw(c1019.39,495.93) LED142.3@1052.5,495.93 ; LED142.3@1072.37,486.05 cw(c1102.25,456.18) 1102.25,498.43 cw(c1102.25,540.67) LED142.3@1072.37,510.8 ; LED141.1@1227.63,486.05 ccw(c1197.75,456.18) 1197.75,498.43 ccw(c1197.75,540.67) LED141.1@1227.63,510.8 ; LED141.1@1240,478.43 cw(c1240,451.18) 1259.27,470.44 ; LED141.1@1247.5,495.93 ccw(c1280.61,495.93) 1257.2,472.52 ; LED141.1@1257.5,495.93 ccw(c1314.75,495.93) 1274.27,455.44 ; 1625.73,455.44 ccw(c1585.25,495.93) LED140.3@1642.5,495.93 ; 1640.73,470.44 cw(c1660,451.18) LED140.3@1660,478.43 ; 1642.8,472.52 ccw(c1619.39,495.93) LED140.3@1652.5,495.93 ; LED140.3@1672.37,486.05 cw(c1702.25,456.18) 1702.25,498.43 cw(c1702.25,540.67) LED140.3@1672.37,510.8 ; LED139.1@1827.63,486.05 ccw(c1797.75,456.18) 1797.75,498.43 ccw(c1797.75,540.67) LED139.1@1827.63,510.8 ; LED139.1@1840,478.43 cw(c1840,451.18) 1859.27,470.44 ; LED139.1@1847.5,495.93 ccw(c1880.61,495.93) 1857.2,472.52 ; LED139.1@1857.5,495.93 ccw(c1914.75,495.93) 1874.27,455.44 ; 2225.73,455.44 ccw(c2185.25,495.93) LED138.3@2242.5,495.93 ; 2240.73,470.44 cw(c2260,451.18) LED138.3@2260,478.43 ; 2242.8,472.52 ccw(c2219.39,495.93) LED138.3@2252.5,495.93 ; LED138.3@2272.37,486.05 cw(c2302.25,456.18) 2302.25,498.43 cw(c2302.25,540.67) LED138.3@2272.37,510.8 ; LED137.1@2427.63,486.05 ccw(c2397.75,456.18) 2397.75,498.43 ccw(c2397.75,540.67) LED137.1@2427.63,510.8 ; LED137.1@2440,478.43 cw(c2440,451.18) 2459.27,470.44 ; LED137.1@2447.5,495.93 ccw(c2480.61,495.93) 2457.2,472.52 ; LED137.1@2457.5,495.93 ccw(c2514.75,495.93) 2474.27,455.44 ; 2825.73,455.44 ccw(c2785.25,495.93) LED136.3@2842.5,495.93 ; 2840.73,470.44 cw(c2860,451.18) LED136.3@2860,478.43 ; 2842.8,472.52 ccw(c2819.39,495.93) LED136.3@2852.5,495.93 ; LED136.3@2872.37,486.05 cw(c2902.25,456.18) 2902.25,498.43 cw(c2902.25,540.67) LED136.3@2872.37,510.8 ; LED135.1@3027.63,486.05 ccw(c2997.75,456.18) 2997.75,498.43 ccw(c2997.75,540.67) LED135.1@3027.63,510.8 ; LED135.1@3040,478.43 cw(c3040,451.18) 3059.27,470.44 ; LED135.1@3047.5,495.93 ccw(c3080.61,495.93) 3057.2,472.52 ; LED135.1@3057.5,495.93 ccw(c3114.75,495.93) 3074.27,455.44 ; 3425.73,455.44 ccw(c3385.25,495.93) LED134.3@3442.5,495.93 ; 3440.73,470.44 cw(c3460,451.18) LED134.3@3460,478.43 ; 3442.8,472.52 ccw(c3419.39,495.93) LED134.3@3452.5,495.93 ; LED134.3@3472.37,486.05 cw(c3502.25,456.18) 3502.25,498.43 cw(c3502.25,540.67) LED134.3@3472.37,510.8 ; LED133.1@3627.63,486.05 ccw(c3597.75,456.18) 3597.75,498.43 ccw(c3597.75,540.67) LED133.1@3627.63,510.8